# Altium PCB ESP32_USB_C.PcbDoc (part 2 of 3)
Units mil, origin at the board's own origin, x right, y up, seen from the top; angles counter-clockwise.
Board outline 2700 x 1000 mil, 4 copper layers (L1, L2, L3, L4), stack 61.605 mil thick; 61 components, 73 nets, 293 pads, 151 vias.
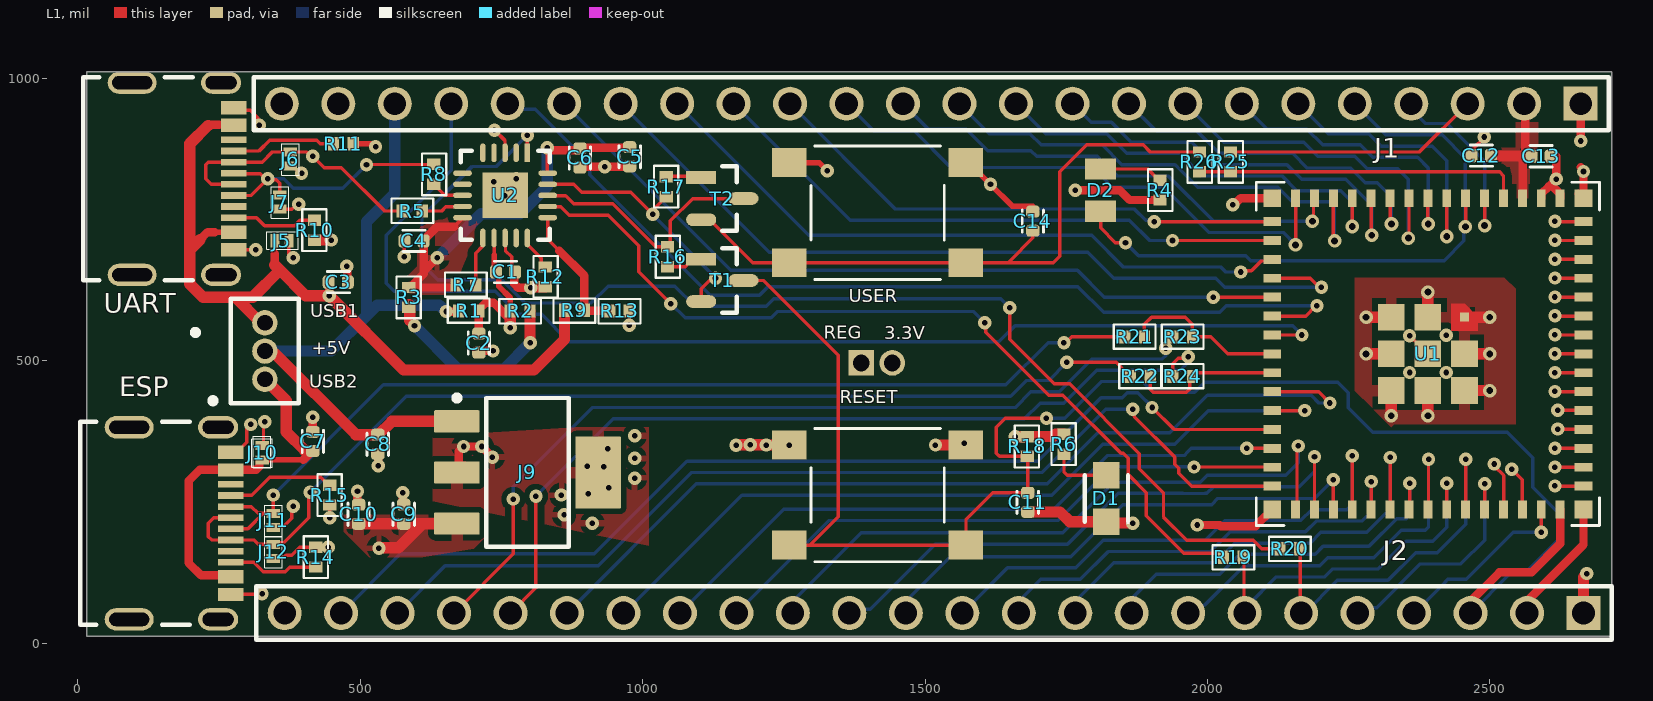
[diagram p0: L1 view]

## Part data (continued)
J5 J6 J7 J10 J11 J12: "TVS DIODE 12VC 3A SOD882 / ESD Suppressor TVS Bi-Dir 5.3V Automotive 2-Pin SOD-882 T/R", Breakdown Voltage=7.8V, Clamping Voltage=12V, Leakage Current=100nA, Manufacturer=Littelfuse, Max Breakdown Voltage=9V, Max Operating Temperature=150°C, Min Breakdown Voltage=6.8V, Min Operating Temperature=-40°C, Operating Supply Voltage=5.3V, Peak Pulse Power=40W, Ratings=AEC-Q101, Supplier Part Number=F9321DKR-ND, Category="TVS Diodes", ComponentLink1Description=https://datasheet.octopart.com:443/AQ3045-01ETG-Littelfuse-datasheet-180606588.pdf?src-supplier=IHS, ComponentLink1URL=https://datasheet.octopart.com:443/AQ3045-01ETG-Littelfuse-datasheet-180606588.pdf?src-supplier=IHS, ComponentLink2Description=https://datasheet.octopart.com:443/AQ3045-01ETG-Littelfuse-datasheet-140480283.pdf?src-supplier=ODG+(Origin+Data+Global), ComponentLink2URL=https://datasheet.octopart.com:443/AQ3045-01ETG-Littelfuse-datasheet-140480283.pdf?src-supplier=ODG+(Origin+Data+Global), ComponentLink3Description=https://datasheet.octopart.com:443/AQ3045-01ETG-Littelfuse-datasheet-101609968.pdf?src-supplier=Farnell, ComponentLink3URL=https://datasheet.octopart.com:443/AQ3045-01ETG-Littelfuse-datasheet-101609968.pdf?src-supplier=Farnell, ComponentLink4Description=https://datasheet.octopart.com:443/AQ3045-01ETG-Littelfuse-datasheet-183003566.pdf?src-supplier=JRH+Electronics, ComponentLink4URL=https://datasheet.octopart.com:443/AQ3045-01ETG-Littelfuse-datasheet-183003566.pdf?src-supplier=JRH+Electronics, ComponentLink5Description=https://datasheet.octopart.com:443/AQ3045-01ETG-Littelfuse-datasheet-170904929.pdf?src-supplier=Future+Electronics, ComponentLink5URL=https://datasheet.octopart.com:443/AQ3045-01ETG-Littelfuse-datasheet-170904929.pdf?src-supplier=Future+Electronics, Lifecycle Status=Production, Manufacturer Part Number=AQ3045-01ETG, Mounting Technology="Surface Mount", Number of Channels=1, Number of Elements=1, Number of Terminals=2, Packaging="Cut Tape", Peak Reverse Current=100nA, Polarity=Bidirectional, Pricing="1=0.71, 10=0.44, 100=0.2817, 500=0.21354, 1000=0.19154, 2000=0.17301, 5000=0.15294 (USD)", REACH SVHC=Yes, Reverse Standoff Voltage=5.3V, RoHS=Compliant, Stock=8433, Supplier=DigiKey
J9: "1.5-A, 20-V, low-dropout voltage regulator with reverse current & reverse voltage protection", Case/Package=SOT-223, Dropout Voltage=340mV, Input Bias Current=1mA, Manufacturer="Texas Instruments", Manufacturer Lifecycle Status=ACTIVE, Manufacturer Part Number=TL1963A-33DCYR, Max Operating Temperature=125°C, Max Output current=1.5A, Max Output Voltage=3.3V, Max Supply Voltage=20V, Min Current Limit=1.6A, Min Input Voltage=2.1V, Min Operating Temperature=-40°C, Supplier Part Number=296-24897-2-ND, Accuracy=3%, Category="LDO Voltage Regulators", ComponentLink1Description=https://datasheet.octopart.com:443/TL1963A-33DCYR-Texas-Instruments-datasheet-36835243.pdf?src-supplier=Texas+Instruments, ComponentLink1URL=https://datasheet.octopart.com:443/TL1963A-33DCYR-Texas-Instruments-datasheet-36835243.pdf?src-supplier=Texas+Instruments, ComponentLink2Description=https://octopart.com:443/opatz8j6/c1?t=T6L_nTitMyNJICCDbesyx6p8_62bCdqZ65S_Z96HuMIXQr7X1YC5sCYKc2G2sZmaKSzTD9pgjmwFXvZyRCcs-Ujiye_mHIO7XarW3zubqPSPpFC5Y6sXmp7ji2rmCsCeRCwBE76czpvbizj29Cxz0drVdDzGMAQ1c3ViNWnyv2jQOxF0qJUxdeVK-EpTX-NywrbSffrJtJOIeNfdNamOHw7Z4NXjvkScFAdPBIROiL9HxVs-b_-th4j6gHgcxnAFtu8UsijG5C9HKMp_DZeyZBevj8g9ql-tL9kNZQiuitw8iXc0YP7uoZ07alNDwNibYxWjFl1MxHNZnYTYABQMPMYSZ2mZceVkBAFerWOuRxAcoR_CV6VtDLLAwMwQpC0P_JBYQnM&src-supplier=Texas+Instruments, ComponentLink2URL=https://octopart.com:443/opatz8j6/c1?t=T6L_nTitMyNJICCDbesyx6p8_62bCdqZ65S_Z96HuMIXQr7X1YC5sCYKc2G2sZmaKSzTD9pgjmwFXvZyRCcs-Ujiye_mHIO7XarW3zubqPSPpFC5Y6sXmp7ji2rmCsCeRCwBE76czpvbizj29Cxz0drVdDzGMAQ1c3ViNWnyv2jQOxF0qJUxdeVK-EpTX-NywrbSffrJtJOIeNfdNamOHw7Z4NXjvkScFAdPBIROiL9HxVs-b_-th4j6gHgcxnAFtu8UsijG5C9HKMp_DZeyZBevj8g9ql-tL9kNZQiuitw8iXc0YP7uoZ07alNDwNibYxWjFl1MxHNZnYTYABQMPMYSZ2mZceVkBAFerWOuRxAcoR_CV6VtDLLAwMwQpC0P_JBYQnM&src-supplier=Texas+Instruments, ComponentLink3Description=https://datasheet.octopart.com:443/TL1963A-33DCYR-Texas-Instruments-datasheet-10255270.pdf?src-supplier=Texas+Instruments, ComponentLink3URL=https://datasheet.octopart.com:443/TL1963A-33DCYR-Texas-Instruments-datasheet-10255270.pdf?src-supplier=Texas+Instruments, ComponentLink4Description=https://sigma.octopart.com:443/49253063/technical_drawing/Texas-Instruments-TL1963A-33DCYR.pdf?src-supplier=Texas+Instruments, ComponentLink4URL=https://sigma.octopart.com:443/49253063/technical_drawing/Texas-Instruments-TL1963A-33DCYR.pdf?src-supplier=Texas+Instruments, ComponentLink5Description=https://datasheet.octopart.com:443/TL1963A-33DCYR-Texas-Instruments-datasheet-159117591.pdf?src-supplier=Augswan, ComponentLink5URL=https://datasheet.octopart.com:443/TL1963A-33DCYR-Texas-Instruments-datasheet-159117591.pdf?src-supplier=Augswan, ComponentLink6Description=https://datasheet.octopart.com:443/TL1963A-33DCYR-Texas-Instruments-datasheet-21820479.pdf?src-supplier=Newark, ComponentLink6URL=https://datasheet.octopart.com:443/TL1963A-33DCYR-Texas-Instruments-datasheet-21820479.pdf?src-supplier=Newark, ComponentLink7Description=https://datasheet.octopart.com:443/TL1963A-33DCYR-Texas-Instruments-datasheet-16079880.pdf?src-supplier=Farnell, ComponentLink7URL=https://datasheet.octopart.com:443/TL1963A-33DCYR-Texas-Instruments-datasheet-16079880.pdf?src-supplier=Farnell, ComponentLink8Description=https://datasheet.octopart.com:443/TL1963A-33DCYR-Texas-Instruments-datasheet-14171511.pdf?src-supplier=iiiC, ComponentLink8URL=https://datasheet.octopart.com:443/TL1963A-33DCYR-Texas-Instruments-datasheet-14171511.pdf?src-supplier=iiiC, ComponentLink9Description=http://sigma.octopart.com:80/reach_statement/Texas-Instruments-company-64.pdf?src-supplier=Compliance+Statements, ComponentLink9URL=http://sigma.octopart.com:80/reach_statement/Texas-Instruments-company-64.pdf?src-supplier=Compliance+Statements, ComponentLink10Description=http://sigma.octopart.com:80/conflict_mineral_statement/Texas-Instruments-company-63.pdf?src-supplier=Compliance+Statements, ComponentLink10URL=http://sigma.octopart.com:80/conflict_mineral_statement/Texas-Instruments-company-63.pdf?src-supplier=Compliance+Statements, Contact Plating=Tin, Height=1.8mm, Lead Free="Lead Free", Length=6.5mm, Lifecycle Status=Production, Min Output Voltage=3.3V, Nominal Output Voltage=3.3V, Number of Outputs=1, Number of Regulators=1, Output Current=1.5A, Output Type=Fixed, Output Voltage=3.3V, Pins=4, Polarity=Positive, Pricing="2500=1.96374, 5000=1.9264 (USD)", Quiescent Current=1mA, Radiation Hardening=No, REACH SVHC=No, RoHS=Compliant, Schedule B="8542390000, 8542390000|8542390000|8542390000|8542390000|8542390000", Stock=9352, Supplier=DigiKey, Thickness=1.6mm, Width=3.5mm
R1 R2 R3 R19 R20 R21 R22 R23 R24: library part RC0402JR-070RL, "GENERAL PURPOSE CHIP RESISTOR Metal Glaze/thick Film, 0.0625W, 0ohm, Surface Mount, 0402", Case Code (Imperial)=0402, Manufacturer="Yageo Group", Max Operating Temperature=155°C, Max Power Dissipation=63mW, Min Operating Temperature=-55°C, Power Rating=62.5mW, Supplier Part Number=311-0.0JRDKR-ND, Temperature Coefficient=200ppm/°C, Tolerance=5%, Voltage Rating=50V, Case/Package=0402, Category="Chip SMD Resistors", China RoHS=Non-Compliant, ComponentLink1Description=https://datasheet.octopart.com:443/RC0402JR-070RL-Yageo-datasheet-182189538.pdf?src-supplier=IHS, ComponentLink1URL=https://datasheet.octopart.com:443/RC0402JR-070RL-Yageo-datasheet-182189538.pdf?src-supplier=IHS, ComponentLink2Description=https://datasheet.octopart.com:443/RC0402JR-070RL-Yageo-datasheet-10408619.pdf?src-supplier=Newark, ComponentLink2URL=https://datasheet.octopart.com:443/RC0402JR-070RL-Yageo-datasheet-10408619.pdf?src-supplier=Newark, ComponentLink3Description=https://datasheet.octopart.com:443/RC0402JR-070RL-Yageo-Group-datasheet-181964826.pdf?src-supplier=Newark, ComponentLink3URL=https://datasheet.octopart.com:443/RC0402JR-070RL-Yageo-Group-datasheet-181964826.pdf?src-supplier=Newark, ComponentLink4Description=https://datasheet.octopart.com:443/RC0402JR-070RL-Yageo-Group-datasheet-190305687.pdf?src-supplier=Future+Electronics, ComponentLink4URL=https://datasheet.octopart.com:443/RC0402JR-070RL-Yageo-Group-datasheet-190305687.pdf?src-supplier=Future+Electronics, ComponentLink5Description=https://datasheet.octopart.com:443/RC0402JR-070RL-Yageo-datasheet-164759695.pdf?src-supplier=Future+Electronics, ComponentLink5URL=https://datasheet.octopart.com:443/RC0402JR-070RL-Yageo-datasheet-164759695.pdf?src-supplier=Future+Electronics, ComponentLink6Description=https://datasheet.octopart.com:443/RC0402JR-070RL-Yageo-datasheet-137700087.pdf?src-supplier=Future+Electronics, ComponentLink6URL=https://datasheet.octopart.com:443/RC0402JR-070RL-Yageo-datasheet-137700087.pdf?src-supplier=Future+Electronics, ComponentLink7Description=https://datasheet.octopart.com:443/RC0402JR-070RL-Yageo-datasheet-12531192.pdf?src-supplier=Seeed+Studio, ComponentLink7URL=https://datasheet.octopart.com:443/RC0402JR-070RL-Yageo-datasheet-12531192.pdf?src-supplier=Seeed+Studio, ComponentLink8Description=https://datasheet.octopart.com:443/RC0402JR-070RL-Yageo-datasheet-8324527.pdf?src-supplier=TME, ComponentLink8URL=https://datasheet.octopart.com:443/RC0402JR-070RL-Yageo-datasheet-8324527.pdf?src-supplier=TME, ComponentLink9Description=https://datasheet.octopart.com:443/RC0402JR-070RL-Yageo-datasheet-62067350.pdf?src-supplier=Farnell, ComponentLink9URL=https://datasheet.octopart.com:443/RC0402JR-070RL-Yageo-datasheet-62067350.pdf?src-supplier=Farnell, ComponentLink10Description=https://datasheet.octopart.com:443/RC0402JR-070RL-Yageo-datasheet-8329306.pdf?src-supplier=element14, ComponentLink10URL=https://datasheet.octopart.com:443/RC0402JR-070RL-Yageo-datasheet-8329306.pdf?src-supplier=element14, ComponentLink11Description=https://datasheet.octopart.com:443/RC0402JR-070RL-Yageo-datasheet-505231.pdf?src-supplier=element14, ComponentLink11URL=https://datasheet.octopart.com:443/RC0402JR-070RL-Yageo-datasheet-505231.pdf?src-supplier=element14, ComponentLink12Description=https://datasheet.octopart.com:443/RC0402JR-070RL-Yageo-datasheet-175423674.pdf?src-supplier=SOS+electronic, ComponentLink12URL=https://datasheet.octopart.com:443/RC0402JR-070RL-Yageo-datasheet-175423674.pdf?src-supplier=SOS+electronic, ComponentLink13Description=https://datasheet.octopart.com/RC0402JR-070RL-Yageo-datasheet-73766026.pdf, ComponentLink13URL=https://datasheet.octopart.com/RC0402JR-070RL-Yageo-datasheet-73766026.pdf, ComponentLink14Description=http://sigma.octopart.com:80/conflict_mineral_statement/Yageo-company-3.pdf?src-supplier=Compliance+Statements, ComponentLink14URL=http://sigma.octopart.com:80/conflict_mineral_statement/Yageo-company-3.pdf?src-supplier=Compliance+Statements, ComponentLink15Description=http://sigma.octopart.com:80/rohs_statement/Yageo-company-2.pdf?src-supplier=Compliance+Statements, ComponentLink15URL=http://sigma.octopart.com:80/rohs_statement/Yageo-company-2.pdf?src-supplier=Compliance+Statements, Composition="Thick Film", Contact Plating=Tin, Depth=500µm, Features="Moisture Resistant", Height=350µm, Lead Free="Lead Free", Length=1mm, Lifecycle Status=Production, Manufacturer Part Number=RC0402JR-070RL, Military Standard=Not, Mounting Technology="Surface Mount", Number of Terminals=2, Number of Terminations=2, Packaging="Tape & Reel", Pins=2, Pricing="1=0.1, 10=0.010, 25=0.0064, 50=0.0056, 100=0.0048, 250=0.00404, 500=0.00356, 1000=0.00313, 5000=0.00237 (USD)", Radiation Hardening=No, REACH SVHC=Yes, RoHS=Compliant, Schedule B="8533290000, 8533290000|8533290000, 8533290000|8533290000|8533290000, 8533290000|8533290000|8533290000|8533290000", Stock=12335532, Supplier=DigiKey, Termination=SMD/SMT, Voltage Rating (DC)=50V, Width=500µm
R4 R6: "Fixed Resistor, Metal Glaze/thick Film, 0.1W, 1000ohm, 75V, 1% +/-Tol, 100ppm/Cel, Surface Mount, 0603", Case Code (Imperial)=0603, Case Code (Metric)=1608, Manufacturer="Yageo Group", Max Operating Temperature=155°C, Min Operating Temperature=-55°C, Power Rating=100mW, Ratings=AEC-Q200, Supplier Part Number=13-AC0603FR-101KLDKR-ND, Temperature Coefficient=100ppm/°C, Tolerance=1%, Voltage Rating=75V, Case/Package=0603, Category="Chip SMD Resistors", China RoHS=Non-Compliant, ComponentLink1Description=https://datasheet.octopart.com:443/AC0603FR-101KL-Yageo-datasheet-182189377.pdf?src-supplier=IHS, ComponentLink1URL=https://datasheet.octopart.com:443/AC0603FR-101KL-Yageo-datasheet-182189377.pdf?src-supplier=IHS, ComponentLink2Description=https://datasheet.octopart.com:443/AC0603FR-101KL-Yageo-datasheet-86786639.pdf?src-supplier=Upverter, ComponentLink2URL=https://datasheet.octopart.com:443/AC0603FR-101KL-Yageo-datasheet-86786639.pdf?src-supplier=Upverter, ComponentLink3Description=https://datasheet.octopart.com:443/AC0603FR-101KL-Yageo-datasheet-178509465.pdf?src-supplier=Newark, ComponentLink3URL=https://datasheet.octopart.com:443/AC0603FR-101KL-Yageo-datasheet-178509465.pdf?src-supplier=Newark, ComponentLink4Description=https://datasheet.octopart.com:443/AC0603FR-101KL-Yageo-datasheet-166720450.pdf?src-supplier=Future+Electronics, ComponentLink4URL=https://datasheet.octopart.com:443/AC0603FR-101KL-Yageo-datasheet-166720450.pdf?src-supplier=Future+Electronics, ComponentLink5Description=https://datasheet.octopart.com:443/AC0603FR-101KL-Yageo-datasheet-164768995.pdf?src-supplier=Future+Electronics, ComponentLink5URL=https://datasheet.octopart.com:443/AC0603FR-101KL-Yageo-datasheet-164768995.pdf?src-supplier=Future+Electronics, ComponentLink6Description=https://datasheet.octopart.com/AC0603FR-101KL-Yageo-datasheet-12512238.pdf, ComponentLink6URL=https://datasheet.octopart.com/AC0603FR-101KL-Yageo-datasheet-12512238.pdf, ComponentLink7Description=http://sigma.octopart.com:80/conflict_mineral_statement/Yageo-company-3.pdf?src-supplier=Compliance+Statements, ComponentLink7URL=http://sigma.octopart.com:80/conflict_mineral_statement/Yageo-company-3.pdf?src-supplier=Compliance+Statements, ComponentLink8Description=http://sigma.octopart.com:80/rohs_statement/Yageo-company-2.pdf?src-supplier=Compliance+Statements, ComponentLink8URL=http://sigma.octopart.com:80/rohs_statement/Yageo-company-2.pdf?src-supplier=Compliance+Statements, Composition="Thick Film", Country of Origin="Mainland China, Taiwan", Export Control Classification Number (ECCN) Code=EAR99, Harmonized Tariff Schedule (HTS) Code=8533.21.00.30, Height=450µm, Introduction Date=2012-04-10, Length=1.6mm, Lifecycle Status=Production, Manufacturer Part Number=AC0603FR-101KL, Mounting Technology="Surface Mount", Number of Terminals=2, Packaging="Tape & Reel", Pricing="1=0.1, 10=0.028, 25=0.0204, 50=0.0164, 100=0.0134, 250=0.01036, 500=0.00868, 1000=0.00735, 5000=0.00527 (USD)", REACH SVHC=Yes, RoHS=Compliant, Stock=46779, Supplier=DigiKey, Termination=SMD/SMT, Width=800µm, Working Voltage=75V
R5 R8 R25 R26: library part RC0402FR-0727RL, "62.5mW Thick Film Resistors 50V ±100ppm/℃ ±1% 27Ω 0402 Chip Resistor - Surface Mount ROHS", Case Code (Imperial)=0402, Case Code (Metric)=1005, Manufacturer="Yageo Group", Max Operating Temperature=155°C, Max Power Dissipation=63mW, Min Operating Temperature=-55°C, Power Rating=62.5mW, Supplier Part Number=YAG3086TR-ND, Temperature Coefficient=100ppm/°C, Tolerance=1%, Voltage Rating=50V, Case/Package=0402, Category="Chip SMD Resistors", China RoHS=Non-Compliant, ComponentLink1Description=https://datasheet.octopart.com:443/RC0402FR-0727RL-Yageo-datasheet-175887523.pdf?src-supplier=Newark, ComponentLink1URL=https://datasheet.octopart.com:443/RC0402FR-0727RL-Yageo-datasheet-175887523.pdf?src-supplier=Newark, ComponentLink2Description=https://datasheet.octopart.com:443/RC0402FR-0727RL-Yageo-datasheet-8324527.pdf?src-supplier=Newark, ComponentLink2URL=https://datasheet.octopart.com:443/RC0402FR-0727RL-Yageo-datasheet-8324527.pdf?src-supplier=Newark, ComponentLink3Description=https://datasheet.octopart.com:443/RC0402FR-0727RL-Yageo-datasheet-103092701.pdf?src-supplier=Upverter, ComponentLink3URL=https://datasheet.octopart.com:443/RC0402FR-0727RL-Yageo-datasheet-103092701.pdf?src-supplier=Upverter, ComponentLink4Description=https://datasheet.octopart.com:443/RC0402FR-0727RL-Yageo-datasheet-10408619.pdf?src-supplier=element14+APAC, ComponentLink4URL=https://datasheet.octopart.com:443/RC0402FR-0727RL-Yageo-datasheet-10408619.pdf?src-supplier=element14+APAC, ComponentLink5Description=https://datasheet.octopart.com:443/RC0402FR-0727RL-Yageo-datasheet-62067350.pdf?src-supplier=element14+APAC, ComponentLink5URL=https://datasheet.octopart.com:443/RC0402FR-0727RL-Yageo-datasheet-62067350.pdf?src-supplier=element14+APAC, ComponentLink6Description=https://datasheet.octopart.com:443/RC0402FR-0727RL-Yageo-Group-datasheet-189192902.pdf?src-supplier=LCSC, ComponentLink6URL=https://datasheet.octopart.com:443/RC0402FR-0727RL-Yageo-Group-datasheet-189192902.pdf?src-supplier=LCSC, ComponentLink7Description=https://datasheet.octopart.com:443/RC0402FR-0727RL-Yageo-Group-datasheet-176638170.pdf?src-supplier=Future+Electronics, ComponentLink7URL=https://datasheet.octopart.com:443/RC0402FR-0727RL-Yageo-Group-datasheet-176638170.pdf?src-supplier=Future+Electronics, ComponentLink8Description=https://datasheet.octopart.com:443/RC0402FR-0727RL-Yageo-datasheet-164759695.pdf?src-supplier=Future+Electronics, ComponentLink8URL=https://datasheet.octopart.com:443/RC0402FR-0727RL-Yageo-datasheet-164759695.pdf?src-supplier=Future+Electronics, ComponentLink9Description=https://datasheet.octopart.com:443/RC0402FR-0727RL-Yageo-datasheet-137700087.pdf?src-supplier=Future+Electronics, ComponentLink9URL=https://datasheet.octopart.com:443/RC0402FR-0727RL-Yageo-datasheet-137700087.pdf?src-supplier=Future+Electronics, ComponentLink10Description=https://datasheet.octopart.com:443/RC0402FR-0727RL-Yageo-datasheet-12531192.pdf?src-supplier=Future+Electronics, ComponentLink10URL=https://datasheet.octopart.com:443/RC0402FR-0727RL-Yageo-datasheet-12531192.pdf?src-supplier=Future+Electronics, ComponentLink11Description=https://datasheet.octopart.com:443/RC0402FR-0727RL-Yageo-datasheet-175423674.pdf?src-supplier=SOS+electronic, ComponentLink11URL=https://datasheet.octopart.com:443/RC0402FR-0727RL-Yageo-datasheet-175423674.pdf?src-supplier=SOS+electronic, ComponentLink12Description=https://datasheet.octopart.com:443/RC0402FR-0727RL-Yageo-datasheet-8329306.pdf?src-supplier=SOS+electronic, ComponentLink12URL=https://datasheet.octopart.com:443/RC0402FR-0727RL-Yageo-datasheet-8329306.pdf?src-supplier=SOS+electronic, ComponentLink13Description=https://datasheet.octopart.com:443/RC0402FR-0727RL-Yageo-datasheet-148775077.pdf?src-supplier=TME, ComponentLink13URL=https://datasheet.octopart.com:443/RC0402FR-0727RL-Yageo-datasheet-148775077.pdf?src-supplier=TME, ComponentLink14Description=https://datasheet.octopart.com/RC0402FR-0727RL-Yageo-datasheet-73766026.pdf, ComponentLink14URL=https://datasheet.octopart.com/RC0402FR-0727RL-Yageo-datasheet-73766026.pdf, ComponentLink15Description=http://sigma.octopart.com:80/conflict_mineral_statement/Yageo-company-3.pdf?src-supplier=Compliance+Statements, ComponentLink15URL=http://sigma.octopart.com:80/conflict_mineral_statement/Yageo-company-3.pdf?src-supplier=Compliance+Statements, ComponentLink16Description=http://sigma.octopart.com:80/rohs_statement/Yageo-company-2.pdf?src-supplier=Compliance+Statements, ComponentLink16URL=http://sigma.octopart.com:80/rohs_statement/Yageo-company-2.pdf?src-supplier=Compliance+Statements, Composition="Thick Film", Country of Origin="Mainland China, Taiwan", Depth=500µm, Export Control Classification Number (ECCN) Code=EAR99, Features="Moisture Resistant", Harmonized Tariff Schedule (HTS) Code=8533.21.00.30, Height=350µm, Introduction Date=2008-07-18, Lead Free="Lead Free", Length=1mm, Lifecycle Status=Production, Manufacturer Part Number=RC0402FR-0727RL, Military Standard=Not, Mounting Technology="Surface Mount", Number of Terminals=2, Number of Terminations=2, Pins=2, Pricing="10000=0.0031, 20000=0.00275, 30000=0.00257, 50000=0.00239, 70000=0.00228, 100000=0.00218 (USD)", REACH SVHC=Yes, RoHS=Compliant, Schedule B="8533210045, 8533210045|8533210045, 8533210045|8533210045|8533210045, 8533210045|8533210045|8533210045|8533210045", Stock=137651, Supplier=DigiKey, Termination=SMD/SMT, Voltage Rating (AC)=50V, Voltage Rating (DC)=50V, Weight=652.039032µg, Width=500µm, Working Voltage=50V
R7: library part 6-1879336-2, "Fixed Resistor, Thin Film, 0.063W, 1000ohm, 50V, 1% +/-Tol, 50ppm/Cel, Surface Mount, 0603", Case Code (Imperial)=0603, Case Code (Metric)=1608, Manufacturer="TE Connectivity", Manufacturer Lifecycle Status=ACTIVE, Max Operating Temperature=155°C, Max Power Dissipation=63mW, Min Operating Temperature=-55°C, Number of Resistors=1, Operating Supply Voltage=50V, Supplier Part Number=A102226CT-ND, Temperature Coefficient=50ppm/°C, Tolerance=1%, Case/Package=0603, Category="Chip SMD Resistors", China RoHS=Compliant, ComponentLink1Description=https://datasheet.octopart.com:443/6-1879336-2-TE-Connectivity-datasheet-158231717.pdf?src-supplier=IHS, ComponentLink1URL=https://datasheet.octopart.com:443/6-1879336-2-TE-Connectivity-datasheet-158231717.pdf?src-supplier=IHS, ComponentLink2Description=https://datasheet.octopart.com:443/CPF0603F1K0C1-TE-Connectivity-datasheet-136771900.pdf?src-supplier=Electro+Sonic, ComponentLink2URL=https://datasheet.octopart.com:443/CPF0603F1K0C1-TE-Connectivity-datasheet-136771900.pdf?src-supplier=Electro+Sonic, ComponentLink3Description=https://datasheet.octopart.com:443/CPF0603F1K0C1-Tyco-Electronics-datasheet-11120073.pdf?src-supplier=TE+Connectivity, ComponentLink3URL=https://datasheet.octopart.com:443/CPF0603F1K0C1-Tyco-Electronics-datasheet-11120073.pdf?src-supplier=TE+Connectivity, ComponentLink4Description=https://datasheet.octopart.com:443/6-1879336-2-TE-Connectivity-datasheet-78339074.pdf?src-supplier=TE+Connectivity, ComponentLink4URL=https://datasheet.octopart.com:443/6-1879336-2-TE-Connectivity-datasheet-78339074.pdf?src-supplier=TE+Connectivity, ComponentLink5Description=https://datasheet.octopart.com:443/CPF0603F1K0C1-Tyco-Electronics-datasheet-13547235.pdf?src-supplier=TE+Connectivity, ComponentLink5URL=https://datasheet.octopart.com:443/CPF0603F1K0C1-Tyco-Electronics-datasheet-13547235.pdf?src-supplier=TE+Connectivity, ComponentLink6Description=https://datasheet.octopart.com:443/CPF0603F1K0C1-Tyco-Electronics-datasheet-11120060.pdf?src-supplier=Newark, ComponentLink6URL=https://datasheet.octopart.com:443/CPF0603F1K0C1-Tyco-Electronics-datasheet-11120060.pdf?src-supplier=Newark, ComponentLink7Description=https://datasheet.octopart.com:443/CPF0603F1K0C1-Tyco-Electronics-datasheet-5303618.pdf?src-supplier=Newark, ComponentLink7URL=https://datasheet.octopart.com:443/CPF0603F1K0C1-Tyco-Electronics-datasheet-5303618.pdf?src-supplier=Newark, ComponentLink8Description=https://datasheet.octopart.com:443/CPF0603F1K0C1-Tyco-Electronics-datasheet-5299551.pdf?src-supplier=Newark, ComponentLink8URL=https://datasheet.octopart.com:443/CPF0603F1K0C1-Tyco-Electronics-datasheet-5299551.pdf?src-supplier=Newark, ComponentLink9Description=https://datasheet.octopart.com:443/CPF0603F1K0C1-Holsworthy-datasheet-11120284.pdf?src-supplier=JRH+Electronics, ComponentLink9URL=https://datasheet.octopart.com:443/CPF0603F1K0C1-Holsworthy-datasheet-11120284.pdf?src-supplier=JRH+Electronics, ComponentLink10Description=https://datasheet.octopart.com:443/CPF0603F1K0C1-TE-Connectivity---Neohm-datasheet-193183182.pdf?src-supplier=JRH+Electronics, ComponentLink10URL=https://datasheet.octopart.com:443/CPF0603F1K0C1-TE-Connectivity---Neohm-datasheet-193183182.pdf?src-supplier=JRH+Electronics, ComponentLink11Description=https://datasheet.octopart.com:443/6-1879336-2-TE-Connectivity---AMP-datasheet-189108484.pdf?src-supplier=JRH+Electronics, ComponentLink11URL=https://datasheet.octopart.com:443/6-1879336-2-TE-Connectivity---AMP-datasheet-189108484.pdf?src-supplier=JRH+Electronics, ComponentLink12Description=https://datasheet.octopart.com:443/CPF0603F1K0C1-TE-Connectivity-datasheet-78339038.pdf?src-supplier=Master+Electronics, ComponentLink12URL=https://datasheet.octopart.com:443/CPF0603F1K0C1-TE-Connectivity-datasheet-78339038.pdf?src-supplier=Master+Electronics, ComponentLink13Description=https://datasheet.octopart.com:443/6-1879336-2-AMP-datasheet-62056503.pdf?src-supplier=Master+Electronics, ComponentLink13URL=https://datasheet.octopart.com:443/6-1879336-2-AMP-datasheet-62056503.pdf?src-supplier=Master+Electronics, ComponentLink14Description=https://datasheet.octopart.com:443/CPF0603F1K0C1-Neohm-datasheet-17911634.pdf?src-supplier=Master+Electronics, ComponentLink14URL=https://datasheet.octopart.com:443/CPF0603F1K0C1-Neohm-datasheet-17911634.pdf?src-supplier=Master+Electronics, ComponentLink15Description=https://datasheet.octopart.com:443/CPF0603F1K0C1-Neohm-datasheet-140860410.pdf?src-supplier=Master+Electronics, ComponentLink15URL=https://datasheet.octopart.com:443/CPF0603F1K0C1-Neohm-datasheet-140860410.pdf?src-supplier=Master+Electronics, ComponentLink16Description=https://datasheet.octopart.com:443/6-1879336-2-TE-Connectivity---AMP-datasheet-187588164.pdf?src-supplier=Master+Electronics, ComponentLink16URL=https://datasheet.octopart.com:443/6-1879336-2-TE-Connectivity---AMP-datasheet-187588164.pdf?src-supplier=Master+Electronics, ComponentLink17Description=https://datasheet.octopart.com:443/CPF0603F1K0C1-TE-Connectivity-datasheet-62316152.pdf?src-supplier=Farnell, ComponentLink17URL=https://datasheet.octopart.com:443/CPF0603F1K0C1-TE-Connectivity-datasheet-62316152.pdf?src-supplier=Farnell, ComponentLink18Description=https://datasheet.octopart.com:443/6-1879336-2-TE-Connectivity-datasheet-184401518.pdf?src-supplier=Farnell, ComponentLink18URL=https://datasheet.octopart.com:443/6-1879336-2-TE-Connectivity-datasheet-184401518.pdf?src-supplier=Farnell, ComponentLink19Description=https://datasheet.octopart.com:443/CPF0603F1K0C1-Tyco-Electronics-datasheet-12510971.pdf?src-supplier=Farnell, ComponentLink19URL=https://datasheet.octopart.com:443/CPF0603F1K0C1-Tyco-Electronics-datasheet-12510971.pdf?src-supplier=Farnell, ComponentLink20Description=https://datasheet.octopart.com:443/6-1879336-2-TE-Connectivity-datasheet-137108763.pdf?src-supplier=X-ON, ComponentLink20URL=https://datasheet.octopart.com:443/6-1879336-2-TE-Connectivity-datasheet-137108763.pdf?src-supplier=X-ON, ComponentLink21Description=http://sigma.octopart.com:80/14739306/rohs_certificate/Holsworthy-CPF0603F1K0C1.pdf?src-supplier=Compliance+Statements, ComponentLink21URL=http://sigma.octopart.com:80/14739306/rohs_certificate/Holsworthy-CPF0603F1K0C1.pdf?src-supplier=Compliance+Statements, Composition="Thin Film", Contact Plating=Tin, Depth=800µm, ELV=Compliant, Export Control Classification Number (ECCN) Code=EAR99, Harmonized Tariff Schedule (HTS) Code=8533.21.00.30, Height=450µm, Introduction Date=2011-07-28, Length=1.55mm, Lifecycle Status=Production, Manufacturer Part Number=6-1879336-2, Military Standard=Not, Mounting Technology="Surface Mount", Number of Terminals=2, Number of Terminations=2, Pins=2, Power Rating=63mW, Pricing="1=0.1, 10=0.044, 25=0.0404, 50=0.0382, 100=0.0361, 250=0.03352, 500=0.03168 (USD)", Radiation Hardening=No, REACH SVHC=Yes, RoHS=Compliant, Schedule B="8533210045, 8533210080, 8533210080|8533210080, 8533210080|8533210080|8533210080", Stock=101651, Supplier=DigiKey, Termination=Solder, Voltage Rating=50V, Voltage Rating (DC)=50V, Weight=2.012816mg, Width=800µm, Working Voltage=50V
R9 R13: library part CRGCQ2512F4K7, "Res Thick Film 2512 4.7K Ohm 1% 1W ±100ppm/C Pad SMD T/R Automotive AEC-Q200", Case/Package=2512, Manufacturer="TE Connectivity", Manufacturer Lifecycle Status=ACTIVE, Max Operating Temperature=155°C, Min Operating Temperature=-55°C, Operating Supply Voltage=200V, Power Rating=1W, Ratings=AEC-Q200, Supplier Part Number=A130001DKR-ND, Temperature Coefficient=100ppm/°C, Tolerance=1%, Category="Chip SMD Resistors", China RoHS=Compliant, ComponentLink1Description=https://datasheet.octopart.com:443/CRGCQ2512F4K7-TE-Connectivity-datasheet-114679081.pdf?src-supplier=Master+Electronics, ComponentLink1URL=https://datasheet.octopart.com:443/CRGCQ2512F4K7-TE-Connectivity-datasheet-114679081.pdf?src-supplier=Master+Electronics, ComponentLink2Description=https://datasheet.octopart.com:443/CRGCQ2512F4K7-TE-Connectivity-datasheet-179161934.pdf?src-supplier=IHS, ComponentLink2URL=https://datasheet.octopart.com:443/CRGCQ2512F4K7-TE-Connectivity-datasheet-179161934.pdf?src-supplier=IHS, ComponentLink3Description=https://sigma.octopart.com:443/114717093/technical_drawing/TE-Connectivity-CRGCQ2512F4K7.pdf?src-supplier=Sager+Electronics, ComponentLink3URL=https://sigma.octopart.com:443/114717093/technical_drawing/TE-Connectivity-CRGCQ2512F4K7.pdf?src-supplier=Sager+Electronics, ComponentLink4Description=http://sigma.octopart.com:80/169816580/materials_sheet/TE-Connectivity-CRGCQ2512F4K7.csv?src-supplier=Compliance+Statements, ComponentLink4URL=http://sigma.octopart.com:80/169816580/materials_sheet/TE-Connectivity-CRGCQ2512F4K7.csv?src-supplier=Compliance+Statements, Composition="Thick Film", Export Control Classification Number (ECCN) Code=EAR99, Harmonized Tariff Schedule (HTS) Code=8533.21.00.30, Height=550µm, Introduction Date=2018-03-13, Length=6.35mm, Lifecycle Status=Production, Manufacturer Part Number=CRGCQ2512F4K7, Mounting Technology="Surface Mount", Number of Terminals=2, Packaging="Cut Tape", Pricing="1=0.43, 10=0.241, 25=0.1992, 50=0.1752, 100=0.156, 250=0.13672, 500=0.12558, 1000=0.11671 (USD)", REACH SVHC=Yes, RoHS=Compliant, Schedule B="8533210025, 8533210025|8533210025|8533210025|8533210025|8533210025, 8533210045", Stock=26193, Supplier=DigiKey, Voltage Rating=200V, Voltage Rating (DC)=200V, Width=3.2mm, Working Voltage=200V
R10 R11 R14 R15: library part ERJ2RKF5101X, "Res Thick Film 0402 5.1K Ohm 1% 0.1W(1/10W) ±100ppm/C Pad SMD Automotive T/R", Case Code (Imperial)=0402, Case Code (Metric)=1005, Manufacturer=Panasonic, Manufacturer Lifecycle Status=ACTIVE, Max Operating Temperature=155°C, Max Power Dissipation=100mW, Min Operating Temperature=-55°C, Ratings=AEC-Q200, Supplier Part Number=P5.10KLDKR-ND, Temperature Coefficient=100ppm/°C, Tolerance=1%, Voltage Rating=50V, Case/Package=0402, Category="Chip SMD Resistors", China RoHS=Non-Compliant, ComponentLink1Description=https://datasheet.octopart.com:443/ERJ2RKF5101X-Panasonic-datasheet-182147282.pdf?src-supplier=IHS, ComponentLink1URL=https://datasheet.octopart.com:443/ERJ2RKF5101X-Panasonic-datasheet-182147282.pdf?src-supplier=IHS, ComponentLink2Description=https://datasheet.octopart.com:443/ERJ2RKF5101X-Panasonic-datasheet-82288794.pdf?src-supplier=Upverter, ComponentLink2URL=https://datasheet.octopart.com:443/ERJ2RKF5101X-Panasonic-datasheet-82288794.pdf?src-supplier=Upverter, ComponentLink3Description=https://datasheet.octopart.com:443/ERJ2RKF5101X-Panasonic-datasheet-48891056.pdf?src-supplier=Newark, ComponentLink3URL=https://datasheet.octopart.com:443/ERJ2RKF5101X-Panasonic-datasheet-48891056.pdf?src-supplier=Newark, ComponentLink4Description=https://datasheet.octopart.com:443/ERJ2RKF5101X-Panasonic-datasheet-136608610.pdf?src-supplier=Newark, ComponentLink4URL=https://datasheet.octopart.com:443/ERJ2RKF5101X-Panasonic-datasheet-136608610.pdf?src-supplier=Newark, ComponentLink5Description=https://datasheet.octopart.com:443/ERJ2RKF5101X-Panasonic-datasheet-33006990.pdf?src-supplier=Newark, ComponentLink5URL=https://datasheet.octopart.com:443/ERJ2RKF5101X-Panasonic-datasheet-33006990.pdf?src-supplier=Newark, ComponentLink6Description=https://datasheet.octopart.com:443/ERJ-2RKF5101X-Panasonic---ECG-datasheet-21211697.pdf?src-supplier=Newark, ComponentLink6URL=https://datasheet.octopart.com:443/ERJ-2RKF5101X-Panasonic---ECG-datasheet-21211697.pdf?src-supplier=Newark, ComponentLink7Description=https://datasheet.octopart.com:443/ERJ2RKF5101X-Panasonic-datasheet-13266541.pdf?src-supplier=RS+(Formerly+Allied+Electronics), ComponentLink7URL=https://datasheet.octopart.com:443/ERJ2RKF5101X-Panasonic-datasheet-13266541.pdf?src-supplier=RS+(Formerly+Allied+Electronics), ComponentLink8Description=https://datasheet.octopart.com:443/ERJ-2RKF5101X-Panasonic-datasheet-154766169.pdf?src-supplier=Master+Electronics, ComponentLink8URL=https://datasheet.octopart.com:443/ERJ-2RKF5101X-Panasonic-datasheet-154766169.pdf?src-supplier=Master+Electronics, ComponentLink9Description=https://datasheet.octopart.com:443/ERJ2RKF5101X-Panasonic-datasheet-188592431.pdf?src-supplier=TME, ComponentLink9URL=https://datasheet.octopart.com:443/ERJ2RKF5101X-Panasonic-datasheet-188592431.pdf?src-supplier=TME, ComponentLink10Description=https://datasheet.octopart.com:443/ERJ2RKF5101X-Panasonic-datasheet-164353789.pdf?src-supplier=TME, ComponentLink10URL=https://datasheet.octopart.com:443/ERJ2RKF5101X-Panasonic-datasheet-164353789.pdf?src-supplier=TME, ComponentLink11Description=https://datasheet.octopart.com/ERJ2RKF5101X-Panasonic-datasheet-78375410.pdf, ComponentLink11URL=https://datasheet.octopart.com/ERJ2RKF5101X-Panasonic-datasheet-78375410.pdf, ComponentLink12Description=https://datasheet.octopart.com:443/ERJ-2RKF5101X-Panasonic---ECG-datasheet-15994758.pdf?src-supplier=Farnell, ComponentLink12URL=https://datasheet.octopart.com:443/ERJ-2RKF5101X-Panasonic---ECG-datasheet-15994758.pdf?src-supplier=Farnell, ComponentLink13Description=https://datasheet.octopart.com:443/ERJ-2RKF5101X-Panasonic---ECG-datasheet-10025800.pdf?src-supplier=Farnell, ComponentLink13URL=https://datasheet.octopart.com:443/ERJ-2RKF5101X-Panasonic---ECG-datasheet-10025800.pdf?src-supplier=Farnell, ComponentLink14Description=https://datasheet.octopart.com:443/ERJ-2RKF5101X-Panasonic---ECG-datasheet-8853621.pdf?src-supplier=Farnell, ComponentLink14URL=https://datasheet.octopart.com:443/ERJ-2RKF5101X-Panasonic---ECG-datasheet-8853621.pdf?src-supplier=Farnell, ComponentLink15Description=https://datasheet.octopart.com:443/ERJ-2RKF5101X-Panasonic---ECG-datasheet-5313456.pdf?src-supplier=Farnell, ComponentLink15URL=https://datasheet.octopart.com:443/ERJ-2RKF5101X-Panasonic---ECG-datasheet-5313456.pdf?src-supplier=Farnell, ComponentLink16Description=https://datasheet.octopart.com:443/ERJ-2RKF5101X-Panasonic-datasheet-41391857.pdf?src-supplier=Electro+Sonic, ComponentLink16URL=https://datasheet.octopart.com:443/ERJ-2RKF5101X-Panasonic-datasheet-41391857.pdf?src-supplier=Electro+Sonic, Composition="Thick Film", Contact Plating=Tin, Country of Origin="Japan, Mainland China", Depth=500µm, Export Control Classification Number (ECCN) Code=EAR99, Harmonized Tariff Schedule (HTS) Code=8533.21.00.30, Height=350µm, Introduction Date=2002-02-12, Lead Free="Lead Free", Length=1mm, Lifecycle Status=Production, Manufacturer Part Number=ERJ2RKF5101X, Military Standard=Not, Mounting Technology="Surface Mount", Number of Terminals=2, Number of Terminations=2, Packaging="Cut Tape", Part Series="Precision Thick Film Chip Resistors", Power Rating=100mW, Pricing="1=0.1, 10=0.031, 25=0.0232, 50=0.0188, 100=0.0155, 250=0.01208, 500=0.01018, 1000=0.00868, 5000=0.00631 (USD)", REACH SVHC=Yes, RoHS=Compliant, Schedule B="8533210045, 8533210045|8533210045|8533210045|8533210045|8533210045|8533210045|8533210045|8533210045|8533210045, 8533210045|8533210045|8533210045|8533210045|8533210045|8533210045|8533210045|8533210045|8533210045|8533210045, 8533210045|8533210045|8533210045|8533210045|8533210045|8533210045|8533210045|8533210045|8533210045|8533210045|8533210045", Stock=567024, Supplier=DigiKey, Termination=SMD/SMT, Voltage Rating (DC)=50V, Weight=793.786648µg, Width=500µm, Working Voltage=50V
R12 R16 R17: library part AC0603FR-7W10KL, "Fixed Resistor, Metal Glaze/Thick Film, 0.2W, 10000ohm, 75V, 1% +/-Tol, Surface Mount, 0603", Case/Package=0603, Manufacturer="Yageo Group", Max Operating Temperature=155°C, Min Operating Temperature=-55°C, Power Rating=200mW, Ratings=AEC-Q200, Supplier Part Number=13-AC0603FR-7W10KLCT-ND, Temperature Coefficient=100ppm/°C, Tolerance=1%, Voltage Rating=75V, Category="Chip SMD Resistors", China RoHS=Non-Compliant, ComponentLink1Description=https://datasheet.octopart.com:443/AC0603FR-7W10KL-Yageo-datasheet-182189377.pdf?src-supplier=IHS, ComponentLink1URL=https://datasheet.octopart.com:443/AC0603FR-7W10KL-Yageo-datasheet-182189377.pdf?src-supplier=IHS, ComponentLink2Description=https://datasheet.octopart.com:443/AC0603FR-7W10KL-Yageo-datasheet-86786639.pdf?src-supplier=Upverter, ComponentLink2URL=https://datasheet.octopart.com:443/AC0603FR-7W10KL-Yageo-datasheet-86786639.pdf?src-supplier=Upverter, ComponentLink3Description=https://datasheet.octopart.com:443/AC0603FR-7W10KL-Yageo-datasheet-178509465.pdf?src-supplier=Farnell, ComponentLink3URL=https://datasheet.octopart.com:443/AC0603FR-7W10KL-Yageo-datasheet-178509465.pdf?src-supplier=Farnell, ComponentLink4Description=https://datasheet.octopart.com/AC0603FR-7W10KL-Yageo-datasheet-12512238.pdf, ComponentLink4URL=https://datasheet.octopart.com/AC0603FR-7W10KL-Yageo-datasheet-12512238.pdf, ComponentLink5Description=http://sigma.octopart.com:80/conflict_mineral_statement/Yageo-company-3.pdf?src-supplier=Compliance+Statements, ComponentLink5URL=http://sigma.octopart.com:80/conflict_mineral_statement/Yageo-company-3.pdf?src-supplier=Compliance+Statements, ComponentLink6Description=http://sigma.octopart.com:80/rohs_statement/Yageo-company-2.pdf?src-supplier=Compliance+Statements, ComponentLink6URL=http://sigma.octopart.com:80/rohs_statement/Yageo-company-2.pdf?src-supplier=Compliance+Statements, Composition="Thick Film", Country of Origin="Mainland China, Taiwan", Export Control Classification Number (ECCN) Code=EAR99, Harmonized Tariff Schedule (HTS) Code=8533.21.00.30, Height=450µm, Introduction Date=2017-06-20, Length=1.6mm, Lifecycle Status=Production, Manufacturer Part Number=AC0603FR-7W10KL, Mounting Technology="Surface Mount", Number of Terminals=2, Packaging="Tape & Reel", Pricing="1=0.1, 10=0.034, 25=0.0256, 50=0.0208, 100=0.0171, 250=0.0134, 500=0.01134, 1000=0.0097 (USD)", REACH SVHC=Yes, RoHS=Compliant, Stock=20427, Supplier=DigiKey, Width=800µm, Working Voltage=75V
R18: library part RC1005F103CS, "Res Thick Film 0402 10K Ohm 1% 0.063W(1/16W) ±100ppm/°C Pad SMD T/R", Case Code (Imperial)=0402, Case Code (Metric)=1005, Manufacturer="Samsung Electro-Mechanics", Max Operating Temperature=155°C, Max Power Dissipation=63mW, Min Operating Temperature=-55°C, Power Rating=62.5mW, Supplier Part Number=1276-3431-2-ND, Temperature Coefficient=100ppm/°C, Tolerance=1%, Voltage Rating=50V, Case/Package=0402, Category="Chip SMD Resistors", China RoHS=Non-Compliant, ComponentLink1Description=https://datasheet.octopart.com:443/RC1005F103CS-Samsung-Electro-Mechanics-datasheet-141348306.pdf?src-supplier=IHS, ComponentLink1URL=https://datasheet.octopart.com:443/RC1005F103CS-Samsung-Electro-Mechanics-datasheet-141348306.pdf?src-supplier=IHS, ComponentLink2Description=https://datasheet.octopart.com/RC1005F103CS-Samsung-Electro-Mechanics-datasheet-41960856.pdf, ComponentLink2URL=https://datasheet.octopart.com/RC1005F103CS-Samsung-Electro-Mechanics-datasheet-41960856.pdf, ComponentLink3Description=https://datasheet.octopart.com:443/RC1005F103CS-Samsung-Electro-Mechanics-datasheet-128083940.pdf?src-supplier=Future+Electronics, ComponentLink3URL=https://datasheet.octopart.com:443/RC1005F103CS-Samsung-Electro-Mechanics-datasheet-128083940.pdf?src-supplier=Future+Electronics, ComponentLink4Description=https://datasheet.octopart.com:443/RC1005F103CS-Samsung-datasheet-12509865.pdf?src-supplier=Future+Electronics, ComponentLink4URL=https://datasheet.octopart.com:443/RC1005F103CS-Samsung-datasheet-12509865.pdf?src-supplier=Future+Electronics, ComponentLink5Description=https://datasheet.octopart.com:443/RC1005F103CS-Samsung-datasheet-22171951.pdf?src-supplier=Future+Electronics, ComponentLink5URL=https://datasheet.octopart.com:443/RC1005F103CS-Samsung-datasheet-22171951.pdf?src-supplier=Future+Electronics, ComponentLink6Description=https://datasheet.octopart.com:443/RC1005F103CS-Samsung-Electro-Mechanics-datasheet-11542935.pdf?src-supplier=Arrow+Electronics, ComponentLink6URL=https://datasheet.octopart.com:443/RC1005F103CS-Samsung-Electro-Mechanics-datasheet-11542935.pdf?src-supplier=Arrow+Electronics, Composition="Thick Film", Contact Plating=Tin, Country of Origin="Mainland China, Philippines, South Korea", Depth=500µm, Export Control Classification Number (ECCN) Code=EAR99, Features="Moisture Resistant", Harmonized Tariff Schedule (HTS) Code=8533.21.00.30, Height=350µm, Introduction Date=2008-04-14, Lead Free="Lead Free", Length=1mm, Lifecycle Status=Production, Manufacturer Part Number=RC1005F103CS, Military Standard=Not, Mounting Technology="Surface Mount", Number of Terminals=2, Number of Terminations=2, Pricing="10000=0.00854, 20000=0.00782, 30000=0.00746, 50000=0.00709, 70000=0.00687, 100000=0.00666 (USD)", Radiation Hardening=No, REACH SVHC=Yes, RoHS=Compliant, Schedule B="8533210045, 8533210045|8533210045|8533210045|8533210045|8533210045", Stock=4875384, Supplier=DigiKey, Thickness=350µm, Voltage Rating (DC)=50V, Width=500µm, Working Voltage=50V
RESET USER: "Switch Tactile N.O SPST Round Button Gull Wing 0.05A 12VDC 100000Cycle 1.57N SMD T/R", Case/Package=SMD/SMT, Color=Black, Contact Current Rating=50mA, Contact Resistance=100mΩ, Insulation Resistance=100GΩ, Manufacturer="C&K Components", Max Operating Temperature=60°C, Max Voltage Rating (DC)=12V, Min Operating Temperature=-20°C, Operating Force=1.57N, Supplier Part Number=CKN9112CT-ND, Actuator Length=850µm, Actuator Material="Nylon, Polyamide", Category="Tactile Switches", China RoHS=Compliant, ComponentLink1Description=https://datasheet.octopart.com:443/PTS645SM43SMTR92LFS-C%26K-Components-datasheet-169841344.pdf?src-supplier=Newark, ComponentLink1URL=https://datasheet.octopart.com:443/PTS645SM43SMTR92LFS-C%26K-Components-datasheet-169841344.pdf?src-supplier=Newark, ComponentLink2Description=https://datasheet.octopart.com:443/PTS645SM43SMTR92LFS-C%26K-Components-datasheet-41191814.pdf?src-supplier=Newark, ComponentLink2URL=https://datasheet.octopart.com:443/PTS645SM43SMTR92LFS-C%26K-Components-datasheet-41191814.pdf?src-supplier=Newark, ComponentLink3Description=https://datasheet.octopart.com:443/PTS645SM43SMTR92LFS-C%26K-Components-datasheet-67873720.pdf?src-supplier=Upverter, ComponentLink3URL=https://datasheet.octopart.com:443/PTS645SM43SMTR92LFS-C%26K-Components-datasheet-67873720.pdf?src-supplier=Upverter, ComponentLink4Description=https://datasheet.octopart.com:443/PTS645SM43SMTR92-LFS-C%26K-Components-datasheet-39117004.pdf?src-supplier=Upverter, ComponentLink4URL=https://datasheet.octopart.com:443/PTS645SM43SMTR92-LFS-C%26K-Components-datasheet-39117004.pdf?src-supplier=Upverter, ComponentLink5Description=https://datasheet.octopart.com:443/PTS645SM43SMTR92LFS-C%26K-Components-datasheet-165782998.pdf?src-supplier=Farnell, ComponentLink5URL=https://datasheet.octopart.com:443/PTS645SM43SMTR92LFS-C%26K-Components-datasheet-165782998.pdf?src-supplier=Farnell, ComponentLink6Description=https://datasheet.octopart.com:443/PTS645SM43SMTR92LFS-C%26K-Components-datasheet-110647872.pdf?src-supplier=HQonline, ComponentLink6URL=https://datasheet.octopart.com:443/PTS645SM43SMTR92LFS-C%26K-Components-datasheet-110647872.pdf?src-supplier=HQonline, ComponentLink7Description=https://datasheet.octopart.com:443/PTS645SM43SMTR92LFS-C%26K-Components-datasheet-24578962.pdf?src-supplier=Future+Electronics, ComponentLink7URL=https://datasheet.octopart.com:443/PTS645SM43SMTR92LFS-C%26K-Components-datasheet-24578962.pdf?src-supplier=Future+Electronics, ComponentLink8Description=https://datasheet.octopart.com:443/PTS645SM43SMTR92LFS-C%26K-Components-datasheet-138128951.pdf?src-supplier=Future+Electronics, ComponentLink8URL=https://datasheet.octopart.com:443/PTS645SM43SMTR92LFS-C%26K-Components-datasheet-138128951.pdf?src-supplier=Future+Electronics, ComponentLink9Description=https://datasheet.octopart.com:443/PTS645SM43SMTR92LFS-C%26K-Components-datasheet-62111174.pdf?src-supplier=Future+Electronics, ComponentLink9URL=https://datasheet.octopart.com:443/PTS645SM43SMTR92LFS-C%26K-Components-datasheet-62111174.pdf?src-supplier=Future+Electronics, ComponentLink10Description=https://datasheet.octopart.com:443/PTS645SM43SMTR92-LFS-C%26K-Components-datasheet-5331042.pdf?src-supplier=Future+Electronics, ComponentLink10URL=https://datasheet.octopart.com:443/PTS645SM43SMTR92-LFS-C%26K-Components-datasheet-5331042.pdf?src-supplier=Future+Electronics, ComponentLink11Description=https://datasheet.octopart.com:443/PTS645SM43SMTR92LFS-C%26K-Components-datasheet-62111384.pdf?src-supplier=Electro+Sonic, ComponentLink11URL=https://datasheet.octopart.com:443/PTS645SM43SMTR92LFS-C%26K-Components-datasheet-62111384.pdf?src-supplier=Electro+Sonic, ComponentLink12Description=https://datasheet.octopart.com:443/PTS645SM43SMTR92-LFS-C%26K-Components-datasheet-23707823.pdf?src-supplier=Electro+Sonic, ComponentLink12URL=https://datasheet.octopart.com:443/PTS645SM43SMTR92-LFS-C%26K-Components-datasheet-23707823.pdf?src-supplier=Electro+Sonic, ComponentLink13Description=https://datasheet.octopart.com:443/PTS645SM43SMTR92LFS-C%26K-Components-datasheet-44395798.pdf?src-supplier=Electro+Sonic, ComponentLink13URL=https://datasheet.octopart.com:443/PTS645SM43SMTR92LFS-C%26K-Components-datasheet-44395798.pdf?src-supplier=Electro+Sonic, ComponentLink14Description=http://sigma.octopart.com:80/reach_statement/ITT-company-18.pdf?src-supplier=Compliance+Statements, ComponentLink14URL=http://sigma.octopart.com:80/reach_statement/ITT-company-18.pdf?src-supplier=Compliance+Statements, Contact Material=Silver, Contact Plating=Silver, Current Rating=50mA, Depth=9mm, Electrical Life=100kcycles, Height=3.45mm, Illumination Type="Illuminated, Non-Illuminated", Lead Free="Lead Free", Length=6mm, Life (Cycles)=100kcycles, Lifecycle Status=Production, Manufacturer Package Identifier=PTS645SM43SMTR92LFS, Manufacturer Part Number=PTS645SM43SMTR92LFS, Max Current Rating=50mA, Mechanical Life=100kcycles, Mounting Technology="Surface Mount", Number of Positions=1, Orientation=Straight, Packaging="Cut Tape (CT)", Pricing="1=0.36, 10=0.313, 25=0.2924, 100=0.2616, 250=0.24244, 500=0.22878 (USD)", REACH SVHC=Yes, RoHS=Compliant, Stock=84628, Supplier=DigiKey, Switch Function=Off-Mom, Termination=Solder, Throw Configuration=SPST, Voltage Rating (DC)=12V
T1 T2: "TRANS NPN 25V 1.5A SOT23-3 / Bipolar (BJT) Transistor NPN 25 V 1.5 A 100MHz 300 mW Surface Mount SOT-23-3", Case/Package=TO-236-3, Collector Base Voltage (VCBO)=40V, Collector Emitter Breakdown Voltage=25V, Collector Emitter Saturation Voltage=500mV, Emitter Base Voltage (VEBO)=5V, Manufacturer=Comchip, Max Collector Current=1.5A, Max Junction Temperature (Tj)=150°C, Max Power Dissipation=300mW, Supplier Part Number=641-1790-6-ND, Transition Frequency=100MHz, Category=BJTs, Collector Emitter Voltage (VCEO)=25V, ComponentLink1Description=https://datasheet.octopart.com:443/SS8050-G-Comchip-datasheet-180131983.pdf?src-supplier=IHS, ComponentLink1URL=https://datasheet.octopart.com:443/SS8050-G-Comchip-datasheet-180131983.pdf?src-supplier=IHS, ComponentLink2Description=https://datasheet.octopart.com:443/SS8050-G-Comchip-datasheet-155422643.pdf?src-supplier=Upverter, ComponentLink2URL=https://datasheet.octopart.com:443/SS8050-G-Comchip-datasheet-155422643.pdf?src-supplier=Upverter, ComponentLink3Description=https://datasheet.octopart.com:443/SS8050-G-Comchip-datasheet-189767092.pdf?src-supplier=LCSC, ComponentLink3URL=https://datasheet.octopart.com:443/SS8050-G-Comchip-datasheet-189767092.pdf?src-supplier=LCSC, Height=1.15mm, hFE Min=40, Lifecycle Status=Production, Manufacturer Part Number=SS8050-G, Max Breakdown Voltage=25V, Max Operating Temperature=150°C, Mounting Technology="Surface Mount", Number of Elements=1, Number of Terminals=3, Power Dissipation=300mW, Pricing="1=0.26, 10=0.157, 100=0.0976, 500=0.0716, 1000=0.06315 (USD)", REACH SVHC=Yes, RoHS=Compliant, Schedule B=8541100070|8541100070|8541100070|8541100070|8541100070, Stock=138544, Supplier=DigiKey